# EAGLE board ASL2001 (EAGLE 6.2)
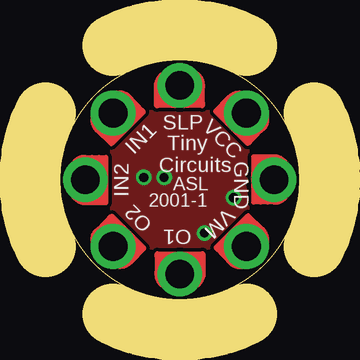
[diagram p0: board, top side]
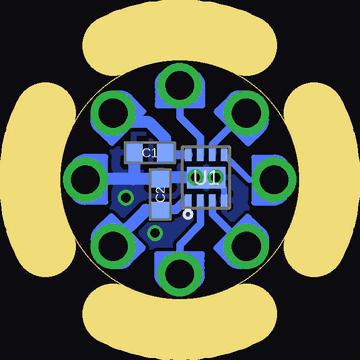
[diagram p1: board, bottom side, seen from below]

Size 10 x 10 mm. Coordinates in mm from the lower left corner, seen from the top.
Outline: circle at 5,5 radius 5
Copper layers (1*16): Top 0.035mm / dielectric 1.5mm / Bottom 0.035mm
Design rules: minimum track width 8mil, minimum drill 15mil, track to track 6mil, track to pad 6mil, pad to pad 6mil, via to via 6mil, smd to smd 6mil, copper to edge 6mil, drill to drill 8mil, minimum pad ring 8mil, minimum via ring 5mil, stop-mask expansion 4mil, vias tented up to drill 25mil, thermal gap 10mil
Milling: 4 lines

## Footprints (pad centres in the part's own frame; a part is rotated, then mirrored left to right if it is on the bottom)
C0402 = smd 0.7 x 0.9: 1 -0.65,0; 2 0.65,0
WSON-8 = smd 0.28 x 0.5: 1 -0.75,-0.95; 2 -0.25,-0.95; 3 0.25,-0.95; 4 0.75,-0.95; 5 0.75,0.95; 6 0.25,0.95; 7 -0.25,0.95; 8 -0.75,0.95 | smd 1.6 x 0.9: 9 0,0
SEWTAP_TH_0402 = drill 1.2 pad 1.867: 1 0,0

## Placement (x,y rotation side)
C1  0.1uF  [C0402]  6.25,6.13 180 bottom
C2  0.1uF  [C0402]  5.81,4.38 90 bottom
U1  DRV8837  [WSON-8]  3.89,5.09 0 bottom
U$2  SEWTABTH_0402  [SEWTAP_TH_0402]  7.78,7.78 225 top
U$3  SEWTABTH_0402  [SEWTAP_TH_0402]  7.78,2.22 135 top
U$4  SEWTABTH_0402  [SEWTAP_TH_0402]  2.22,7.78 315 top
U$5  SEWTABTH_0402  [SEWTAP_TH_0402]  1.06,5 0 top
U$6  [DOCFIELD-TINYCIRCUITS-PCB]  29,-15 0 top  (outside the outline)
U$8  SEWTABTH_0402  [SEWTAP_TH_0402]  5,8.94 270 top
U$9  SEWTABTH_0402  [SEWTAP_TH_0402]  8.94,5 180 top
U$10  SEWTABTH_0402  [SEWTAP_TH_0402]  5,1.06 90 top
U$11  SEWTABTH_0402  [SEWTAP_TH_0402]  2.22,2.22 45 top

## Library data of the parts
C1 C2 = tinycircuits; PARTNO: AS-ITM-00008
U1 = tinycircuits; PARTNO: AS-ITM-00042
U$2-U$5 U$8-U$11 = tinycircuits; BOM: EXCLUDE; DATABASE: ./../../../../../Components/TinyCircuits_Part_Database.txt; DNP: T
U$6 = tinycircuits; NO_BOM: TRUE

## Nets
GND: C1.2 C2.2 U1.4 U1.9 U$9.1
N$3: C1.1 U1.8 U$2.1
N$4: U1.7 U$8.1
N$5: U1.5 U$5.1
N$6: U1.6 U$4.1
N$7: C2.1 U1.1 U$3.1
N$9: U1.2 U$10.1
N$10: U1.3 U$11.1

## Tracks (layer width: path | path; a pad name or v marks a point on that pad's centre or on a via)
GND  (via drill 0.38)
  Bottom 0.254: U1.4 3.14,4.61 3.41,4.89 3.69,4.89 U1.9 | 5.74,5.09 C2.2 | 8.91,5.03 U$9.1 | 6.9,5.07 6.95,5.03
  Bottom 0.508: U1.9 5.74,5.09 | C2.2 6.95,5.03 8.91,5.03 | C1.2 6.9,5.07
  other vias: 7.25,4.25 3.5,5.1 4.35,5.1 6.03,2.77
  pour Top: 0.2,5 arc180 9.8,5 arc180
  pour Bottom: 0.2,5 arc180 9.8,5 arc180
N$3
  Bottom 0.254: 5.52,6.04 C1.1 | 7.4,7.4 U$2.1
  Bottom 0.381: U1.8 5.52,6.04
  Bottom 0.508: C1.1 5.6,6.72 6.29,7.4 7.4,7.4
N$4
  Bottom 0.254: U$8.1
  Bottom 0.305: U1.7 4.14,6.76 4.99,7.61 U$8.1
N$5
  Bottom 0.254: U$5.1 2.1,5 U1.5
N$6
  Bottom 0.254: U$4.1 2.33,7.78 | U1.6
  Bottom 0.305: 2.33,7.78 3.64,6.46 U1.6
N$7
  Bottom 0.254: U1.1 4.77,4.14 | 5.79,3.75 C2.1 5.82,3.75 | U$3.1 7.78,2.38
  Bottom 0.381: 4.77,4.14 5.17,3.75 5.79,3.75
  Bottom 0.508: 7.78,2.38 6.41,3.75 5.82,3.75
N$9
  Bottom 0.254: 4.13,4.13 U1.2
  Bottom 0.305: U$10.1 5,2.29 4.13,3.16 4.13,4.13
N$10
  Bottom 0.254: U$11.1 2.25,2.17 | 3.64,4.12 U1.3
  Bottom 0.305: 2.25,2.17 3.64,3.57 3.64,4.12

## Text on the board
tPlace: SLP | Tiny | IN1 | Circuits | GND | VCC | ASL | IN2 | 2001-1 | VM | O2 | O1
Document: FABRICATION DRAWING | NOTES: | 1. PRINTED CIRCUIT BOARD MADE FROM NEMA GRADE FR-4 EPOXY LAMINATE | WITH 1 OUNCE COPPER PLATING AND .024 THICKNESS. | 2. ALL DIMENSIONS ARE GIVEN IN INCHES. | 3. CIRCUIT PATHS ARE FOR REFERENCE ONLY. | 4. HOLE SIZES SHOWN ARE FINISHED DIAMETERS AFTER PLATING. | 5. BOARD PLATED USING REFLOW OR SIMILAR METHOD. | 6. BOARD TO HAVE BLUE SOLDER MASK ON PLATED SURFACES USING WET FILM | 7. SILKSCREEN BOARD USING WHITE INK. | SR100 OR SR1010 EPOXY. EQUIVALENT WET OR DRY FILM MAY BE USED. | 8. THE FOLLOWING INFORMATION APPLIES TO THIS BOARD: | * 2 COPPER LAYERS | * .024 BOARD THICKNESS | * REQUIRES TOP SIDE SILKSCREEN | Released under the Creative Commons Attribution Share-Alike 3.0 License | http://creativecommons.org/licenses/by-sa/3.0 | LilyPad Arduino Design by Leah Buechley and Sparkfun Electronics | Original Arduino Uno Design by Team Arduino | TinyDuino, TinyLily and TinyShield Designs by TinyCircuits | TinyLily Switch - 3mm | AS-PCB-ASL1101 | 1